# Altium PCB uz_per_ktr_torque_box.PcbDoc
Units mm, origin at the board's own origin, x right, y up, seen from the top; angles counter-clockwise.
Board outline 50 x 80 mm, 2 copper layers (Top Layer, Bottom Layer), stack 0.68 mm thick; 28 components, 15 nets, 80 pads, 6 vias.
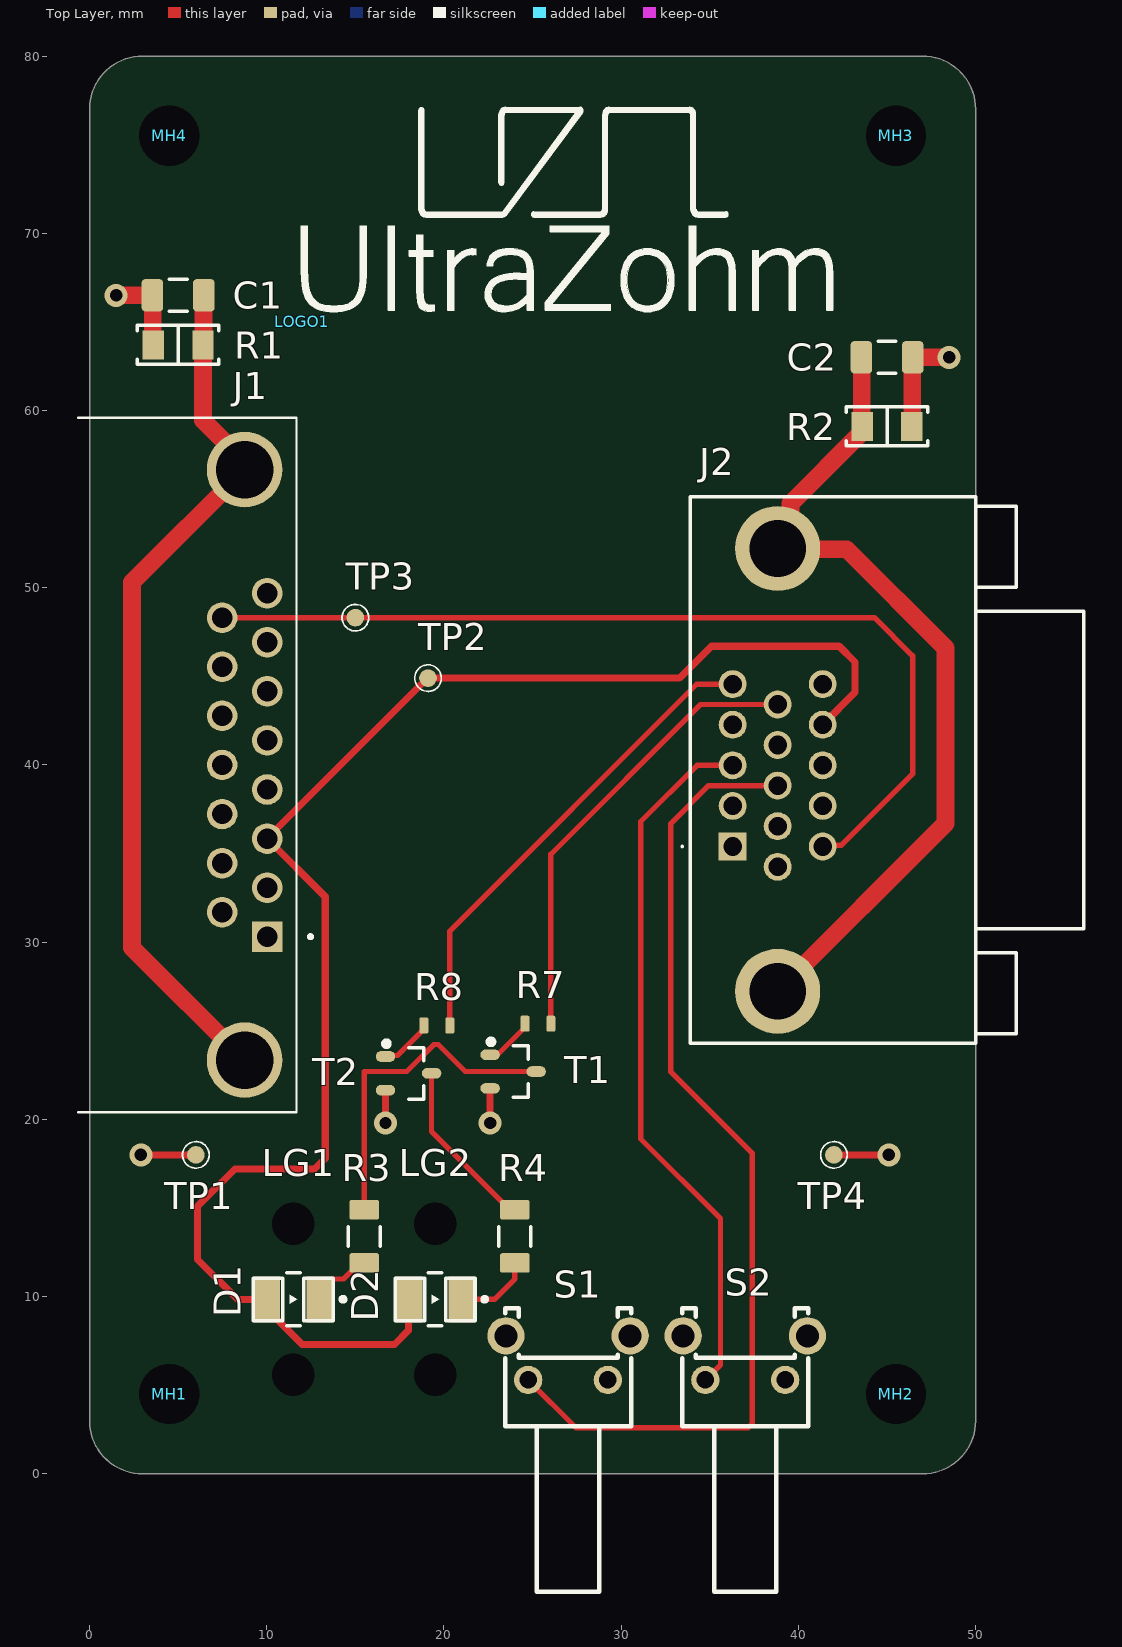
[diagram p0: Top Layer view]
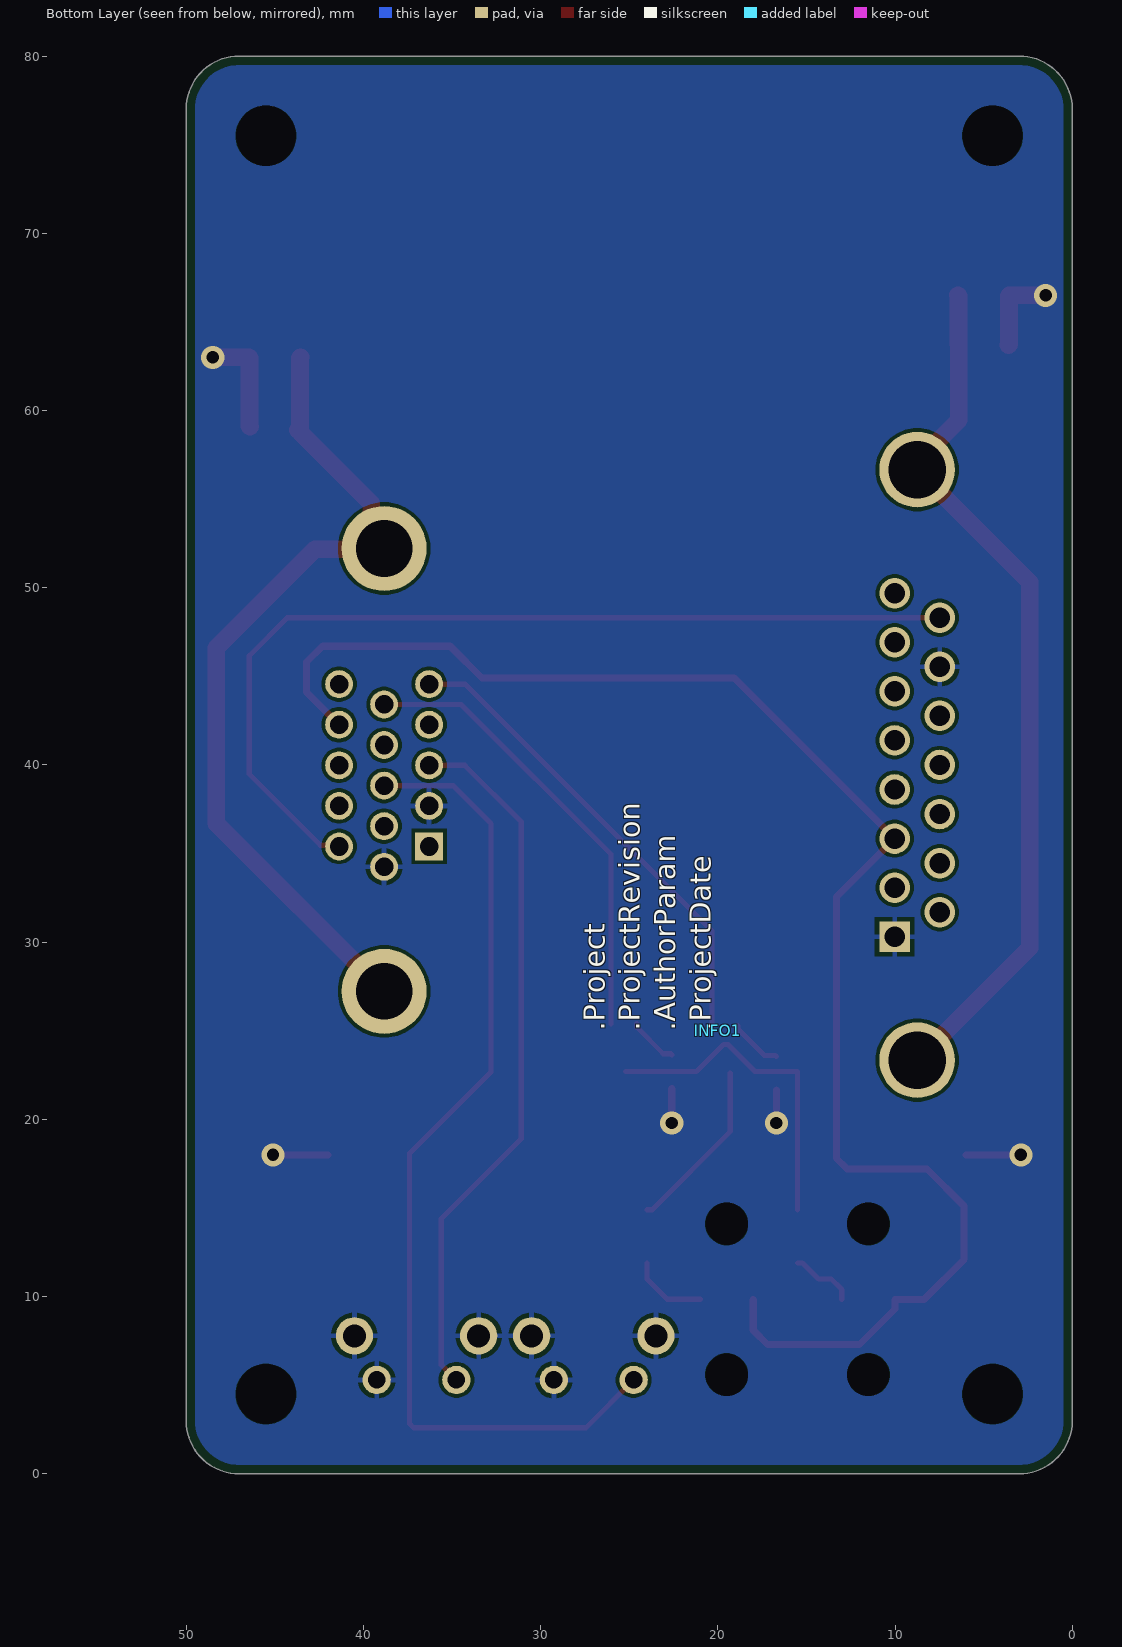
[diagram p1: Bottom Layer view, seen from below]
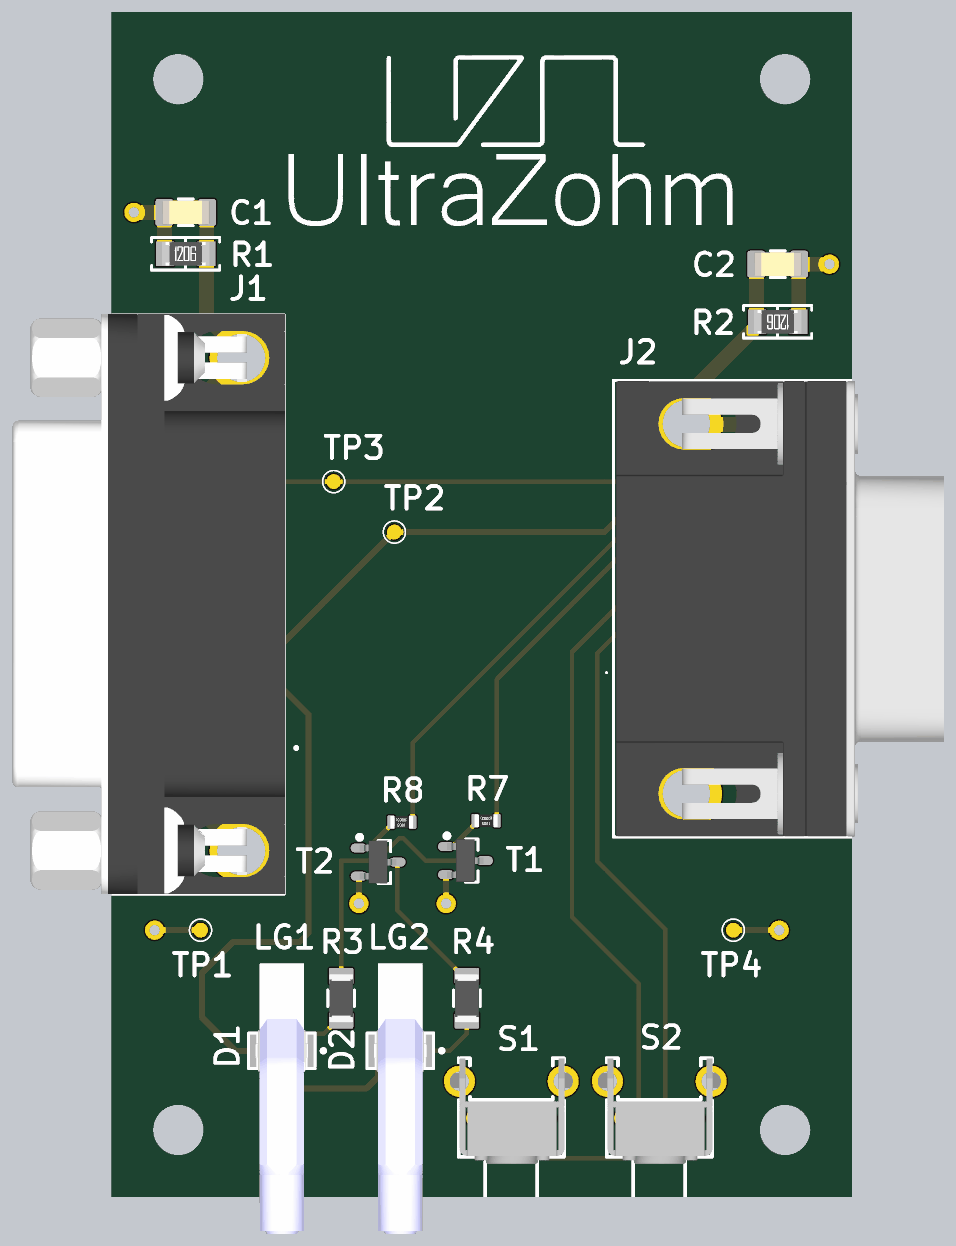
[diagram p2: 3D render of the assembled board from above, using the file's embedded part models]

## Layer stack, top to bottom
Top Solder: solder mask 0.01, Solder Resist, Dk 3.5
Top Layer: signal copper 0.035
Dielectric 4: prepreg 0.115, FR-4, Dk 4.4
Dielectric 1: core 0.38, Core-036, Dk 4.4
Dielectric 5: prepreg 0.115, FR-4, Dk 4.4
Bottom Layer: signal copper 0.035
Bottom Solder: solder mask 0.01, Solder Resist, Dk 3.5

## Board outline
0,3 0,77 cw(c3,77) 3,80 47,80 cw(c47,77) 50,77 50,3 cw(c47,3) 47,0 3,0 cw(c3,3)

## Design rules (kind name [scope] priority, off if disabled: settings)
AssemblyTestPointUsage [InNetClass('3V3_SingleEnded') or InNetClass('5V_SingleEnded') or InNetClass('15V_SingleEnded') or InNetClass('DifferentialSignals')] p1:
BoardOutlineClearance [All] p1: gap=0.5 ignorepadtopadclearanceinfootprint=FALSE except(0: Arc-SplitContinuation Track-SplitContinuation SMDPad-SplitContinuation THPad-SplitContinuation Via-SplitContinuation Fill-SplitContinuation Poly-SplitContinuation Region-SplitContinuation Text-SplitContinuation)
Clearance Clearance_Differential [InNetClass('DifferentialSignals')] p1: gap=0.1 ignorepadtopadclearanceinfootprint=TRUE except(0: Arc-Hole Track-Hole SMDPad-Hole THPad-Hole Via-Hole Fill-Hole Poly-Hole Region-Hole Text-Hole; 0.3: SMDPad-Via; 0.4: THPad-Via)
Clearance Clearance_Power [InNetClass('Power')] p2: gap=0.1 ignorepadtopadclearanceinfootprint=TRUE except(0: Arc-Hole Track-Hole SMDPad-Hole THPad-Hole Via-Hole Fill-Hole Poly-Hole Region-Hole Text-Hole; 0.15: Via-Poly; 0.2: Track-Poly; 0.25: THPad-Poly; 0.3: Fill-Poly Poly-Region; 0.5: Poly-Poly)
Clearance [All] p3: gap=0.1 ignorepadtopadclearanceinfootprint=TRUE except(0: Arc-Hole Track-Hole SMDPad-Hole THPad-Hole Via-Hole Fill-Hole Poly-Hole Region-Hole Text-Hole; 0.2: THPad-Poly; 0.4: SMDPad-Via THPad-Via; 0.5: Poly-Poly)
ComponentClearance [All] p1: gap=0.1 collisioncheckmode=3 verticalgap=0.1 showdistances=FALSE
DiffPairsRouting [InNetClass('DifferentialSignals')] p1: maxlimit=0.127 minlimit=0.127 mostfreqgap=0.127 toplayer_minwidth=0.285 toplayer_maxwidth=0.285 toplayer_prefwidth=0.265 bottomlayer_minwidth=0.285 bottomlayer_maxwidth=0.285 bottomlayer_prefwidth=0.265 impedanceprofiledriven=TRUE impedanceprofileid={5F7DE71B-7B0B-4CDE-8AE7-8AD61221F3A5} impedanceprofilevalue=100.000000 maxuncoupledlength=12.7
FanoutControl Fanout_Power [InNetClass('Power') or InNet('ENABLE')] p1: bgadir=Out bgaviamode=Centered fanoutstyle=Auto fanoutdirection=None viagrid=0.025
FanoutControl Fanout_RS422 [InNetClass('DifferentialSignals')] p2: bgadir=Out bgaviamode=Closest fanoutstyle=Rows fanoutdirection=OutOnly viagrid=0.025
FanoutControl Fanout_BGA [IsBGA] p3 off: bgadir=Out bgaviamode=Centered fanoutstyle=Auto fanoutdirection=Alternating viagrid=0.025 // Fanout_BGA (Default Rule)
FanoutControl Fanout_LCC [IsLCC] p4 off: bgadir=Out bgaviamode=Centered fanoutstyle=Auto fanoutdirection=Alternating viagrid=0.025 // Fanout_LCC (Default Rule)
FanoutControl Fanout_SOIC [IsSOIC] p5 off: bgadir=Out bgaviamode=Centered fanoutstyle=Auto fanoutdirection=Alternating viagrid=0.025 // Fanout_SOIC (Default Rule)
FanoutControl Fanout_Small [(CompPinCount < 5)] p6 off: bgadir=Out bgaviamode=Centered fanoutstyle=Auto fanoutdirection=OutThenIn viagrid=0.025 // Fanout_Small (Default Rule)
FanoutControl Fanout_Default [All] p7: bgadir=NE bgaviamode=Closest fanoutstyle=Rows fanoutdirection=InOnly viagrid=0.025 // Fanout_Default (Default Rule)
Height [All] p1: minheight=0 maxheight=50 prefheight=12.7
HoleSize [All] p1: absolutevalues=TRUE maxlimit=4 minlimit=0.025 maxpercent=80.000 minpercent=20.000
PolygonConnect PolygonConnect_Therm [HoleSize > 2.6] p1: connectstyle=Direct reliefconductorwidth=0.254 reliefentries=4 polygonreliefangle="90 Angle" airgapwidth=0.254
PolygonConnect PolygonConnect_via [InPadClass('pad') or IsVia] p2: connectstyle=Direct reliefconductorwidth=0.254 reliefentries=4 polygonreliefangle="90 Angle" airgapwidth=0.254
PolygonConnect [All] p3: connectstyle=Relief reliefconductorwidth=0.3 reliefentries=4 polygonreliefangle="90 Angle" airgapwidth=0.25
RoutingLayers RoutingLayers_3V3Signals [InNetClass('3V3_SingleEnded')] p1 off: top layer_v5=TRUE bottom layer_v5=TRUE
RoutingLayers RoutingLayers_SingleEnded [InNetClass('15V_SingleEnded') or InNetClass('3V3_SingleEnded') or InNetClass('5V_SingleEnded')] p2 off: top layer_v5=TRUE bottom layer_v5=TRUE
RoutingLayers RoutingLayers_Differential [InNetClass('DifferentialSignals')] p3 off: top layer_v5=TRUE bottom layer_v5=FALSE
RoutingLayers [All] p4: top layer_v5=TRUE bottom layer_v5=TRUE
RoutingVias [All] p1: holewidth=0.3 width=0.5 viastyle="Through Hole" minholewidth=0.2 minwidth=0.4 maxholewidth=0.5 maxwidth=1
SolderMaskExpansion [All] p1: expansion=0.102 istentingtop=FALSE
UnRoutedNet UnRoutedNet_Signals [InNetClass('15V_SingleEnded') or InNetClass('3V3_SingleEnded') or InNetClass('5V_SingleEnded') or InNetClass('DifferentialSignals')] p1: checkbadconnections=TRUE
UnRoutedNet [All] p2: checkbadconnections=TRUE
Width Width_Power [InNetClass('Power')] p1: maxlimit=10 minlimit=0.2 preferedwidth=0.3 minimp=50.000000 maximp=50.000000 favimp=50.000000
Width [All] p2: maxlimit=10 minlimit=0.1 preferedwidth=0.3 minimp=50.000000 maximp=50.000000 favimp=50.000000
18 further rules are at their usual default settings.

## Classes and differential pairs
component class TopSheet: INFO1 LOGO1 MH1 MH2 MH3 MH4

## Components (designator, comment, footprint, x,y, rotation, side; value= is the part's Value field where it differs from the comment)
C1 "100 pF" C_1206 5,66.5 r180 top
C2 "100 pF" C_1206 45,63 r0 top
D1 "LG T67K-H2K1-24-Z" FP-LS_T676-Q1R2-1-Z-MFG 11.5,9.85 r180 top locked
D2 "LS T676-Q1R2-1" FP-LS_T676-Q1R2-1-Z-MFG 19.5,9.85 r180 top locked
INFO1 "Design Information" Design_info 20,25 r90 bottom locked
J1 "DS1037-15FNAKT74-0CC" "PCB - MISC - DSUB15" 8.75,40 r270 top locked (schematic designator J2)
J2 "DS1038-15MBNSIA74-0CC" DSUB15-3 36.29,35.4 r90 top locked (schematic designator J1)
LG1 "1271.1000" 1271.1000 11.5,14.1 r270 top locked
LG2 "1271.1000" 1271.1000 19.5,14.1 r270 top locked
LOGO1 "UZ Logo" UZ_Logo_small 12,65 r0 top
MH1 "Mounting Hole" MH_3.4 4.5,4.5 r90 top locked
MH2 "Mounting Hole" MH_3.4 45.5,4.5 r90 top locked
MH3 "Mounting Hole" MH_3.4 45.5,75.5 r90 top locked
MH4 "Mounting Hole" MH_3.4 4.5,75.5 r90 top locked
R1 "0R" "RES 1206_3216" 5,63.7 r0 top
R2 "0R" "RES 1206_3216" 45,59.1 r180 top
R3 "1k6" R_1206_TE 15.5,13.4 r180 top
R4 "4k7" R_1206_TE 24,13.4 r180 top
R7 "10k" R_0603_TE 25.3,25.4 r270 top
R8 "10k" R_0603_TE 19.6,25.3 r270 top
S1 "2-1825027-0" 2-1825027-0 27,4.5 r0 top locked
S2 "2-1825027-0" 2-1825027-0 37,4.5 r0 top locked
T1 "MMBT3904" SOT95P280X145-3N 23.9,22.7 r0 top value="40 V"
T2 "MMBT3904" SOT95P280X145-3N 18,22.6 r0 top value="40 V"
TP1 "Testpoint 1mm" TP_1mm 6,18 r90 top
TP2 "Testpoint 1mm" TP_1mm 19.1,44.9 r180 top
TP3 "Testpoint 1mm" TP_1mm 15,48.31 r90 top
TP4 "Testpoint 1mm" TP_1mm 42,18 r90 top

## Footprints (in the part's own frame and the unit in brackets; to place one, negate y for a bottom-side part, rotate by r counter-clockwise, add the part's x,y. Pads: shape width x height; smd on the part's side, far side on the other; paste and mask are expansions set on the pad)
2-1825027-0 [mm]
  round 1.6 hole 0.99: 1(-2.25,0.8) 2(2.25,0.8)
  round 2.1 hole 1.3: 3(-3.505,3.29) 3(3.505,3.29)
  silkscreen extent -3.55,-11.16 3.55,4.84, body extent -4.15,-2.31 4.25,4.84, height 7
1271.1000 [mm]
  round 2.1 hole 2.4 unplated: 1(0,0) 2(8.5,0)
  silkscreen extent 3.05,-2.25 5.45,2.25, body extent -1.65,-1.5 16.64,1.5, height 6.58
C_1206 [mm]
  rrect33% 1.21x1.82 smd: 1(1.45,0) 2(-1.45,0)
  silkscreen extent -0.5,-0.9 0.5,0.9, body extent -1.6,-0.81 1.6,0.81, height 1.82
Design_info [mm] "Design information about the PCB"
DSUB15-3 [mm]
  rect 1.575x1.575 hole 1.05: 1(0,0)
  round 1.575 hole 1.05: 2(2.29,0) 3(4.58,0) 4(6.87,0) 5(9.16,0) 6(-1.145,-2.54) 7(1.145,-2.54) 8(3.435,-2.54) 9(5.725,-2.54) 10(8.015,-2.54) 11(0,-5.08) 12(2.29,-5.08) 13(4.58,-5.08) 14(6.87,-5.08) 15(9.16,-5.08)
  round 4.8 hole 3.2: S1(-8.175,-2.54) S2(16.815,-2.54)
  silkscreen extent -11.1,-19.81 19.74,2.9, body extent -11.09,-19.94 19.72,2.23, height 12.62
FP-LS_T676-Q1R2-1-Z-MFG [mm]
  rect 1.5x2.6 smd paste+0 mask+0: 1(-1.5,0) 2(1.5,0)
  silkscreen extent -2.93,-1.5 0.38,1.5, body extent -2.35,-1.6 2.35,1.6, height 0.25
MH_3.4 [mm]
  round 3.1 hole 3.4 unplated: 1(0,0)
"PCB - MISC - DSUB15" [mm]
  rect 1.725x1.725 / inner round 1.725 / far side rect 1.725x1.725 hole 1.15: 1(9.695,1.27)
  round 1.725 hole 1.15: 2(6.925,1.27) 3(4.155,1.27) 4(1.385,1.27) 5(-1.385,1.27) 6(-4.155,1.27) 7(-6.925,1.27) 8(-9.695,1.27) 9(8.31,-1.27) 10(5.54,-1.27) 11(2.77,-1.27) 12(0,-1.27) 13(-2.77,-1.27) 14(-5.54,-1.27) 15(-8.31,-1.27)
  round 4.266 hole 3.25: S1(-16.66,0) S2(16.66,0)
  silkscreen extent -19.6,-9.4 19.6,3.82, body extent -19.63,-15.45 19.57,2.95, height 12.5
R_0603_TE [mm] "Vishay D0603 1.55 x 0.85 (+0.1/-0.05) 0.3 +/- 0,2mm Kontakte"
  rrect33% 0.9x0.5 smd: 1(0,0.73) 2(0,-0.73)
  body extent -0.42,-0.78 0.43,0.77, height 0.45
R_1206_TE [mm] "Vishay D1206 3.2 x 1.6 (+/- 0.15), 0.2mm - 0.6mm Kontakte"
  rrect20% 1.66x1.1 smd: 1(0,1.5) 2(0,-1.5)
  silkscreen extent -0.9,-0.55 0.9,0.55, body extent -0.8,-1.62 0.8,1.63, height 0.6
"RES 1206_3216" [mm] "Chip Resistor, 2-Leads, Body 3.13x1.55mm, IPC Medium Density"
  rect 1.2x1.65 smd: 1(-1.4,0) 2(1.4,0)
  silkscreen extent -2.3,-1.1 2.3,1.1, body extent -1.6,-0.8 1.6,0.8, height 0.6
SOT95P280X145-3N [mm] "SOT23, 3-Leads, Body 3,0x3,0mm (max), Pitch 0,95mm, IPC Medium Density"
  oval 1.1x0.6 smd: 1(-1.3,0.95) 2(-1.3,-0.95) 3(1.3,0)
  silkscreen extent -1.4,-1.45 0.85,1.82, body extent -1.25,-1.46 1.23,1.46, height 1.01
TP_1mm [mm]
  round 1 smd paste-1: 1(0,0)
  silkscreen extent -0.75,-0.75 0.75,0.75
UZ_Logo_small [mm] "logo width 3cm"
  silkscreen extent -0.05,0.57 29.94,12.12

## Part data
C1 C2: library part 885342008009, "Capacitor 1206, 1 kVDC, 100 pF, C0G", Device Package=1206, Manufacturer="Wuerth Elektronik", Operating Temperature="-55 - 125°C", Supplier Part Number 1=710-885342008009, Tolerance="5 %", Voltage Rating="1 kVDC", Component Type="Capacitor 1206", ComponentLink1Description=Datasheet, ComponentLink1URL=https://www.mouser.de/datasheet/2/445/885342008009-1727900.pdf, Created from=MGremer, Created On="20.12.2020 13:54:13", Last Updated="20.12.2020 17:44:37", Live Cycle Status=1, Manufacturer Part Number=885342008009, Mounting Type=SMD, PartID=62, Series=WCAP-CSMH, Stock number="Labor SMD Container", Supplier 1=Mouser, Type=Capacitor
D1: "Standard LEDs - SMD Green, 570nm 9mcd, 2mA", Color=green, Device Package=PLCC-2, Forward Current I_f="20 mA", Forward Voltage U_f=2.2V, LCSC Part Number=C5248446, Manufacturer="OSRAM Opto Semicon", Nominal Power=44mW, Operating Temperature="-40 - 100 °C", Component Type="LED Diode", ComponentLink1Description=Datasheet, ComponentLink1URL=https://dammedia.osram.info/media/resource/hires/osram-dam-5522864/LG%20T67K_EN.pdf, Created from=FRosner, Created On="17/07/2024 13:28:00", Last Updated="17/07/2024 14:01:05", Light Intensity="6.28 mcd", Live Cycle Status=1, Manufacturer Part Number="LG T67K-H2K1-24-Z", Mounting Type=SMD, PartID=17, Stock number="not stored", Supplier 1=LCSC, Supplier Part Number 1=C5248446, Type=Standard, Wavelength="570 nm"
D2: "Standard LEDs - SMD Super Red, 645nm 180mcd, 20mA", Color=red, Device Package=PLCC-2, Forward Current I_f="20 mA", Forward Voltage U_f=2.3V, LCSC Part Number=C19360690, Manufacturer="OSRAM Opto Semicon", Nominal Power=46mW, Operating Temperature="-40 - 100 °C", Component Type="LED Diode", ComponentLink1Description=Datasheet, ComponentLink1URL=https://wmsc.lcsc.com/wmsc/upload/file/pdf/v2/lcsc/2312251447_OSRAM-Opto-Semicon-LS-T676-Q1R2-1_C19360690.pdf, Created from=FRosner, Created On="17/07/2024 13:16:06", Last Updated="17/07/2024 13:21:16", Light Intensity="71 ... 180 mcd", Live Cycle Status=1, Manufacturer Part Number="LS T676-Q1R2-1", Mounting Type=SMD, PartID=16, Stock number="not stored", Supplier 1=LCSC, Supplier Part Number 1=C19360690, Type=Standard, Wavelength="633 nm"
INFO1: Manufacturer=UltraZohm, Supplier Part Number 1=-, Component Type="Design Information", ComponentLink1Description=https://docs.ultrazohm.com/, ComponentLink1URL=homepage, Created from=MGremer, Created On="03.11.2021 09:04:23", Last Updated="15.04.2025 09:29:36", Live Cycle Status=1, Manufacturer Part Number="Design Information", PartID=12, Supplier 1=-, Type="Design Information"
J1: "15 Female D-Sub Shrouded 2 3A -40℃~+85℃ Plugin D-Sub/DVI/HDMI Connectors ROHS", BOM_JLCPCB Part Class="Extended Part", BOM_Manufacturer=Nextron(台湾正凌), BOM_Manufacturer Part=SUB-DRBF-607A-002, Device Package=THT, LCSC Part Number=C77835, Manufacturer="CONNFLY Elec", Operating Temperature=-40℃+105℃, BOM_Supplier=LCSC, BOM_Supplier Part=C2846090, Component Type="DSUB 15 pole female", ComponentLink1Description=Datasheet, ComponentLink1URL=https://jlcpcb.com/partdetail/ConnflyElec-DS1037_15FNAKT740CC/C77835, Contributor=LCSC, Created from=FRosner, Created On="17.03.2023 15:40:49", Last Updated="04.05.2023 15:17:49", Live Cycle Status=1, Manufacturer Part Number=DS1037-15FNAKT74-0CC, Mounting Type=THT, PartID=10, spicePre=D, spiceSymbolName=SUB-DRBF-607A-002, Stock number="not stored", Supplier 1=LCSC, Supplier Part Number 1=C77835, Type="DSUB 15 pole"
J2: "15P Male D-Sub Bend insert 3 1.5A -40℃~+105℃ Push-Pull D-Sub / VGA Connectors ROHS", BOM_JLCPCB Part Class="Extended Part", BOM_Manufacturer=Nextron(台湾正凌), BOM_Manufacturer Part=SUB-DRBF-607A-002, Device Package=THT, LCSC Part Number=C77842, Manufacturer="CONNFLY Elec", Operating Temperature=-40℃+105℃, BOM_Supplier=LCSC, BOM_Supplier Part=C2846090, Component Type="DSUB 15 pole male", ComponentLink1Description=Datasheet, ComponentLink1URL=https://jlcpcb.com/partdetail/ConnflyElec-DS1038_15MBNSIA740CC/C77842, Contributor=LCSC, Created from=FRosner, Created On="26.05.2025 08:45:47", Last Updated="26.05.2025 08:45:47", Live Cycle Status=1, Manufacturer Part Number=DS1038-15MBNSIA74-0CC, Mounting Type=THT, PartID=12, spicePre=D, spiceSymbolName=SUB-DRBF-607A-002, Stock number="not stored", Supplier 1=LCSC, Supplier Part Number 1=C77842, Type="DSUB 15 pole"
LG1 LG2: "Light guide, horizontal, 18.29 mm, 1 rod, round, PCB mounting, transparent", Device Package=SMD, LCSC Part Number=C22441102, Manufacturer=MENTOR, Operating Temperature="-40°C - +85°C", Supplier Part Number 1=2300553, Component Type="Light Guide", ComponentLink1Description=Datasheet, ComponentLink1URL=https://www.farnell.com/datasheets/1693501.pdf, Created from=FRosner, Created On="15.07.2024 08:35:38", Last Updated="15.07.2024 08:35:38", Live Cycle Status=1, Manufacturer Part Number=1271.1000, Mounting Type=SMD, PartID=39, Stock number="not stored", Supplier 1=Farnell, Supplier 2=LCSC, Supplier Part Number 2=C22441102, Type=Lightguide
LOGO1: library part 1, "Official Project Logo of the UltraZohm", Manufacturer="PCB Manufacturer", Manufacturer Part Number="UltraZohm Logo", Component Type=Logo, ComponentLink1Description=Homepage, ComponentLink1URL=https://ultrazohm.com, Created from="T. Wendt", Created On="19.02.2021 16:55:56", Last Updated="02.03.2021 14:31:24", Live Cycle Status=1, PartID=1, Type="Standard (No BOM)"
MH1 MH2 MH3 MH4: Device Package=-, Component Type="Mounting Hole", ComponentLink1Description=Datasheet, Created from=MHlatky, Created On="26.01.2021 09:19:51", Last Updated="21.03.2022 23:05:12", Live Cycle Status=1, Manufacturer="Mounting Hole", Manufacturer Part Number="Mounting Hole", PartID=16, Stock number="not stored", Supplier 1="Mounting Hole", Supplier Part Number 1="Mounting Hole", Type="Mounting Hole"
R1 R2: library part 1206W4F0000T5E, "250mW Thick Film Resistors ±800ppm/℃ ±1% 0Ω 1206 Chip Resistor - Surface Mount ROHS", Device Package=1206, LCSC Part Number=C17888, Manufacturer=UNI-ROYAL, Tolerance=1%, Component Type="SMD resistor", ComponentLink1Description=Datasheet, ComponentLink1URL=https://datasheet.lcsc.com/lcsc/2206010200_UNI-ROYAL-Uniroyal-Elec-1206W4F0000T5E_C17888.pdf, Created from=AGeiger, Created On="06.06.2023 20:12:49", Last Updated="06.06.2023 20:12:49", Live Cycle Status=1, Manufacturer Part Number=1206W4F0000T5E, Mounting Type=SMD, PartID=271, Supplier 1=LCSC, Supplier Part Number 1=C17888, Type=Resistor
R3: library part UZgen_R_1206_1k6, "Generic resistor", Device Package=1206, Manufacturer=UZgen, Tolerance="1 %", Created from=UZgenTool, Created On="02/07/2024 17:29:56", Last Updated="02/07/2024 17:29:56", Manufacturer Part Number=UZgen_R_1206_1k6, Mounting Type=SMD, PartID=513
R4: library part UZgen_R_1206_4k7, "Generic resistor", Device Package=1206, Manufacturer=UZgen, Tolerance="1 %", Created from=UZgenTool, Created On="02/07/2024 17:29:56", Last Updated="02/07/2024 17:29:56", Manufacturer Part Number=UZgen_R_1206_4k7, Mounting Type=SMD, PartID=524
R7 R8: library part UZgen_R_0603_10k, "Generic resistor", Device Package=0603, Manufacturer=UZgen, Tolerance="1 %", Created from=AGeiger, Created On="02/07/2024 14:34:53", Last Updated="02/07/2024 14:37:16", Manufacturer Part Number=UZgen_R_0603_10k, Mounting Type=SMD, PartID=1
S1 S2: "Round Button 50mA Direct Insert SPST - normally open 160gf 24V Plugin Tactile Switches ROHS", Device Package=THT, LCSC Part Number=C590206, Manufacturer="TE Connectivity", Operating Temperature="-20 to +105 °C", Component Type="Round Button", ComponentLink1Description=Datasheet, ComponentLink1URL=https://jlcpcb.com/api/file/downloadByFileSystemAccessId/8590147071803228160, Created from=FRosner, Created On="18.06.2025 09:18:18", Last Updated="18.06.2025 09:18:18", Live Cycle Status=1, Manufacturer Part Number=2-1825027-0, Mounting Type=THT, PartID=60, Supplier 1=LCSC, Supplier Part Number 1=C590206, Type=Button
T1 T2: "Bipolartransistor, 40V 200mW 200mA 100@10mA,1V 300MHz 300mV@50mA,5mA NPN +150℃@(Tj) SOT-23(SOT-23-3)", Collector Basis Voltage="60 V", Collector Emitter Voltage="40 V", Device Package=SOT-23-3, LCSC Part Number=C20526, Manufacturer="Jiangsu Changjing Electronics Technology Co., Ltd.", Operating Temperature="-55 - 150 °C", Power Dissipation="200 mW", Component Type=Bipolartransistor, ComponentLink1Description=Datasheet, ComponentLink1URL=https://datasheet.lcsc.com/lcsc/1811011934_Jiangsu-Changjing-Electronics-Technology-Co---Ltd--MMBT3904_C20526.pdf, Created from=NDiringer, Created On="10/06/2022 12:04:49", Last Updated="10/08/2022 13:48:16", Live Cycle Status=1, Manufacturer Part Number=MMBT3904, Mounting Type=SMD, Number Of Channels=single, PartID=2, Polarization=NPN, Series=MMBT3904, Supplier 1=Mouser, Supplier 2=LCSC/JLCPCB, Supplier Part Number 1=MMBT3904, Supplier Part Number 2=C20526, Type=Bipolartransistor
TP1 TP2 TP3 TP4: library part NULL, Component Type=Testpoint, Created=2018_06_25_AGeiger, Created from=AGeiger, Created On="20.09.2022 13:14:57", Last Updated="20.09.2022 13:15:39", Live Cycle Status=1, Manufacturer=NULL, Manufacturer Part Number=NULL, PartID=9, Supplier 1=NULL, Supplier Part Number 1=NULL, Type=Testpoint

## Via types
v1: diameter 1.3, hole 0.7, Top Layer to Bottom Layer, 6 vias

## Nets (pads, with @x,y where several pads share a name; then routed paths per layer and width w, separated by ;. In a path a pad name is that pad's centre, name@x,y a point inside that pad or via, vN(x,y) a via of type N, cw(c..) or ccw(c..) an arc to the next point about the centre after c; other vN are vias at no path point)
24V: D1.2 D2.2 J1.3 J2.14 TP2.1 | length 89.4
  Top Layer w0.4: D2.2 18,8.1 17.2,7.3 12,7.3 10,9.3 D1.2 8.35,9.85 6.1,12.1 6.1,15.1 8.2,17.2 12.7,17.2 13.3,17.8 13.3,32.565 J1.3 19.075,44.9 33.3,44.9 35.1,46.7 42.3,46.7 43.2,45.8 43.2,44.1 J2.14
GND: C1.1 C2.1 J1.1 J1.14 J2.2 J2.6 R1.1 R2.1 S1.2 S1.3 S2.2 S2.3 T1.2 T2.2 TP1.1 TP4.1 | length 20.8
  Top Layer w0.4: v1(2.9,18) TP1.1 ; v1(16.7,19.8) T2.2 ; v1(22.6,19.8) T1.2 ; TP4.1 v1(45.1,18)
  Top Layer w1: v1(1.5,66.5) C1.1 3.575,66.475 3.575,63.725 R1.1 ; R2.1 46.425,59.125 46.425,62.975 C2.1 v1(48.5,63)
LED1: J2.10 R7.1 | length 25.9
  Top Layer w0.3: R7.1 26.03,34.96 34.485,43.415 J2.10
LED2: J2.5 R8.1 | length 27.1
  Top Layer w0.3: R8.1 20.33,30.63 34.26,44.56 J2.5
NetC1_2: C1.2 J1.S1 J1.S2 R1.2 | length 49.4
  Top Layer w1: C1.2 6.425,66.475 6.425,63.725 R1.2 6.4,59.448 8.75,57.098 J1.S1 2.4,50.31 2.4,29.69 J1.S2
NetC2_2: C2.2 J2.S1 J2.S2 R2.2 | length 47.8
  Top Layer w1: J2.S1 48.3,36.695 48.3,46.6 42.73,52.17 38.875,52.17 J2.S2 39.557,52.942 39.557,54.757 43.5,58.7 43.5,58.775 43.625,58.9 R2.2@43.7,58.9 ; C2.2 43.575,62.975 43.575,59.125 R2.2
NetD1_1: D1.1 R3.1 | length 3.7
  Top Layer w0.3: D1.1 13,10.4 13.6,11 14.32,11 15.22,11.9 R3.1
NetD2_1: D2.1 R4.1 | length 4.4
  Top Layer w0.3: D2.1 22.85,9.85 24,11 R4.1
NetR3_2: R3.2 T1.3 | length 18.8
  Top Layer w0.3: R3.2 15.5,22.7 17.9,22.7 19.426,24.226 19.674,24.226 21.2,22.7 T1.3
NetR4_2: R4.2 T2.3 | length 9.8
  Top Layer w0.3: T2.3 19.3,19.32 23.72,14.9 R4.2
NetR7_2: R7.2 T1.1 | length 2.8
  Top Layer w0.3: T1.1 22.657,23.707 23.077,23.707 24.57,25.2 R7.2
NetR8_2: R8.2 T2.1 | length 3
  Top Layer w0.3: T2.1 16.757,23.607 17.377,23.607 18.87,25.1 R8.2
"Taster 1": J2.8 S1.1 | length 56.6
  Top Layer w0.3: S1.1 27.45,2.6 37.166,2.6 37.4,2.834 37.4,18.083 32.8,22.683 32.8,36.7 34.935,38.835 J2.8
"Taster 2": J2.3 S2.1 | length 40.2
  Top Layer w0.3: S2.1 35.6,6.15 35.6,14.4 31.1,18.9 31.1,36.8 34.28,39.98 J2.3
Torque: J1.15 J2.11 TP3.1 | length 53.3
  Top Layer w0.3: J1.15 TP3.1 44.29,48.31 46.442,46.158 46.442,39.488 42.432,35.478 41.448,35.478 J2.11
pads on no net: J1.2 J1.4 J1.5 J1.6 J1.7 J1.8 J1.9 J1.10 J1.11 J1.12 J1.13 J2.1 J2.4 J2.7 J2.9 J2.12 J2.13 J2.15 LG1.1 LG1.2 LG2.1 LG2.2 MH1.1 MH2.1 MH3.1 MH4.1

## Polygon pours and split planes (outlines as drawn)
GND on Bottom Layer "GND_L02_P000" (solid, pour order 0): 0,80 50,80 50,0 0,0

## Silkscreen, mask and mechanical layers (free items; w line width, h text height)
Mechanical 1:
  the board outline again, w0.05

## Dimensions
141.141,0 to 141.141,100 on Mechanical 2
146.143,97.802 to -14.84,72.216 on Mechanical 2
141.141,100 to -14.853,72.225 on Mechanical 2
141.141,100 to 0.031,100 on Mechanical 2

## Text inside footprints (layer, text, board x,y; h text height)
J1: Top Assembly "PCB EDGE" at -0.14,19.68 h1.27 r270